# Altium PCB pcbphongbep.PcbDoc
Units mm, origin at the board's own origin, x right, y up, seen from the top; angles counter-clockwise.
Board outline 104.77 x 80.77 mm, 2 copper layers (Top Layer, Bottom Layer); 29 components, 24 nets, 93 pads, 4 vias.
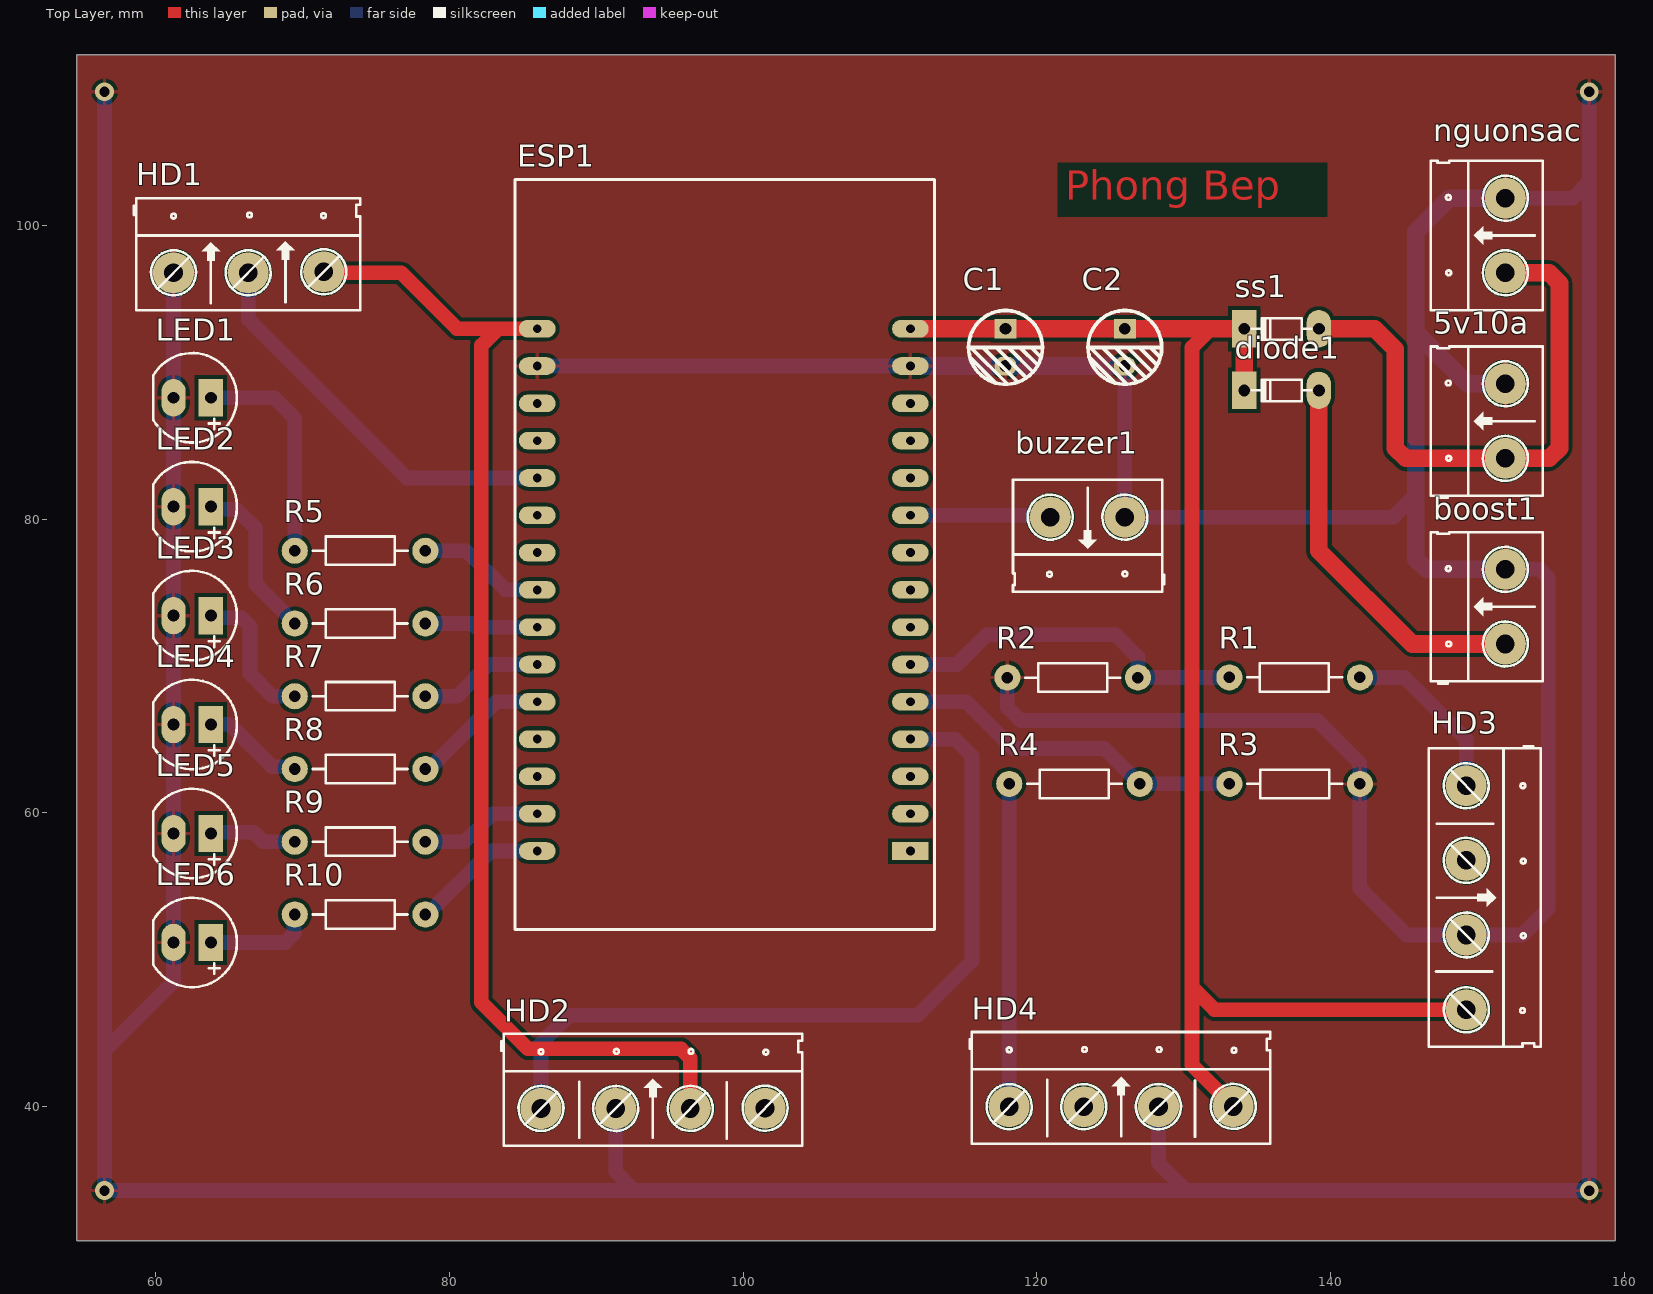
[diagram p0: Top Layer view]
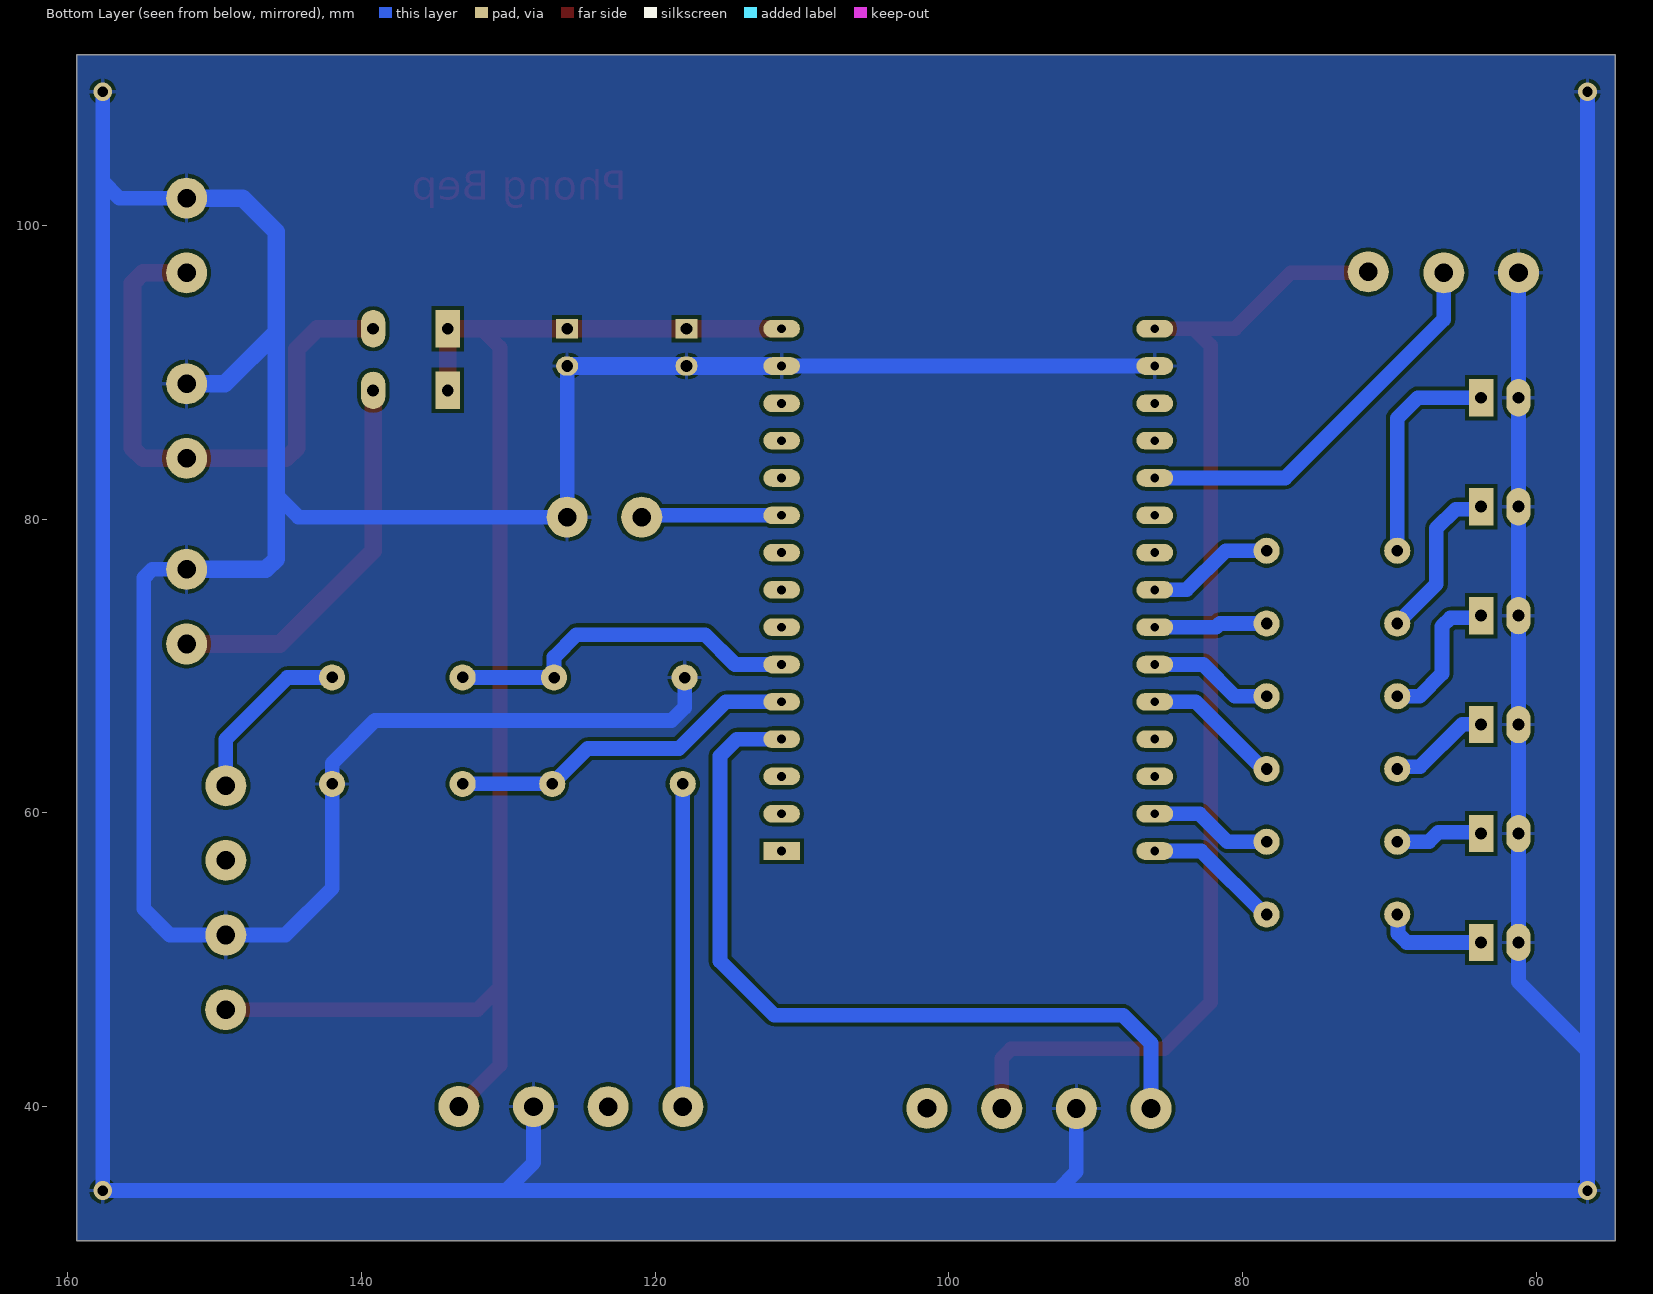
[diagram p1: Bottom Layer view, seen from below]
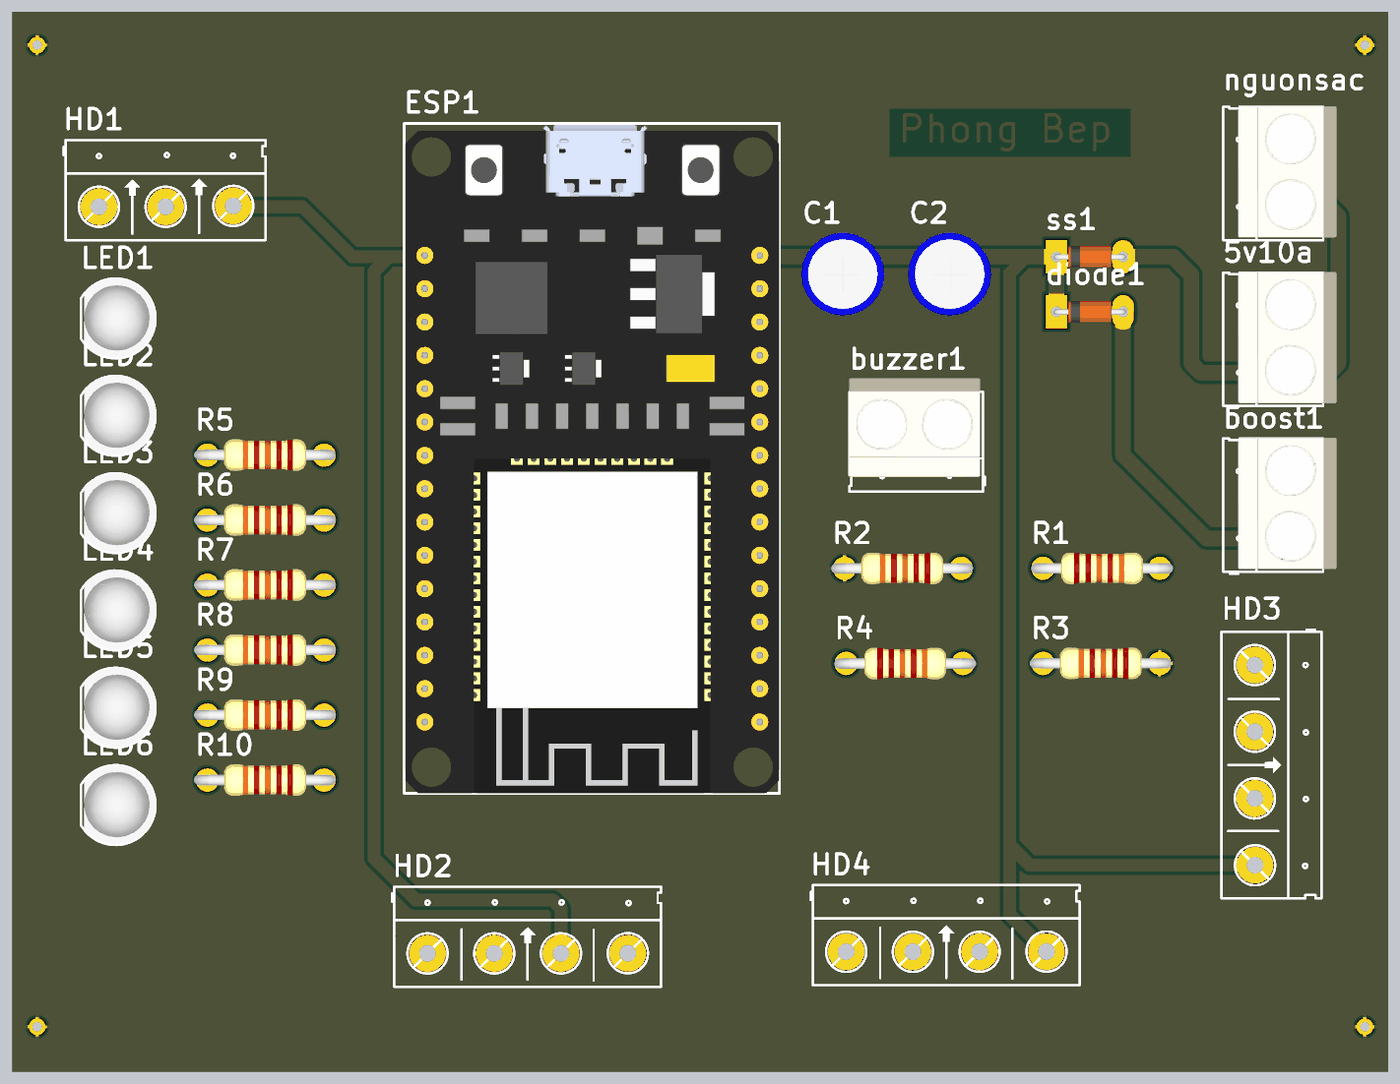
[diagram p2: 3D render of the assembled board from above, using the file's embedded part models]

## Layer stack, top to bottom
Top Solder: solder mask 0.0102, Solder Resist, Dk 3.5
Top Layer: signal copper 0.0356
Dielectric 1: dielectric 0.32, FR-4, Dk 4.8
Bottom Layer: signal copper 0.0356
Bottom Solder: solder mask 0.0102, Solder Resist, Dk 3.5

## Board outline
54.61,30.861 159.385,30.861 159.385,111.633 54.61,111.633

## Design rules (kind name [scope] priority, off if disabled: settings)
Clearance [All] p1: gap=0.254 ignorepadtopadclearanceinfootprint=FALSE except(0: Arc-Hole Track-Hole SMDPad-Hole THPad-Hole Via-Hole Fill-Hole Poly-Hole Region-Hole Text-Hole)
PolygonConnect [All] p1: connectstyle=Relief reliefconductorwidth=0.254 reliefentries=4 polygonreliefangle="90 Angle" airgapwidth=0.254
RoutingCorners [All] p1: cornerstyle=45-Degree minsetback=1 maxsetback=1
RoutingVias [All] p1: holewidth=0.711 width=1.27 viastyle="Through Hole" minholewidth=0.711 minwidth=1.27 maxholewidth=0.711 maxwidth=1.27
SolderMaskExpansion [All] p1: expansion=0.102 istentingtop=FALSE
Width [All] p1: maxlimit=1.2 minlimit=0.8 preferedwidth=1
29 further rules are at their usual default settings.

## Components (designator, comment, footprint, x,y, rotation, side; value= is the part's Value field where it differs from the comment)
5v10a "Header 2_1" HED2 151.892,84.138 r90 top value="Header 2"
boost1 "Header 2_1" HED2 151.892,71.501 r90 top value="Header 2"
buzzer1 "Header 2_1" HED2 125.984,80.137 r180 top value="Header 2"
C1 "0.1uF" "tu hoa 5mm" 117.856,91.694 r270 top
C2 "47uF" "tu hoa 5mm" 125.984,91.694 r270 top
diode1 "100v" "DIODE 0.5A" 136.652,88.773 r0 top
ESP1 "ESP32 DEVKIT" "ESP32 WROOM 32 KIT" 111.379,57.404 r180 top
HD1 "DHT BEP" HED3 61.214,96.774 r0 top value="Header 3"
HD2 "FLAMESENSOR" HED4 86.233,39.878 r0 top value="Header 4"
HD3 "KHOI" HED4 149.223,61.851 r270 top value="Header 4"
HD4 "GASS" HED4 118.108,40.003 r0 top value="Header 4"
LED1 "LED" LED-5-Green 63.754,88.265 r180 top value="LED 3 ly Single Colour"
LED2 "LED" LED-5-Green 63.754,80.848 r180 top value="LED 3 ly Single Colour"
LED3 "LED" LED-5-Green 63.754,73.431 r180 top value="LED 3 ly Single Colour"
LED4 "LED" LED-5-Green 63.754,66.015 r180 top value="LED 3 ly Single Colour"
LED5 "LED" LED-5-Green 63.754,58.598 r180 top value="LED 3 ly Single Colour"
LED6 "LED" LED-5-Green 63.754,51.181 r180 top value="LED 3 ly Single Colour"
nguonsac "Header 2_1" HED2 151.892,96.774 r90 top value="Header 2"
R1 "10k" R1/4W 141.986,69.227 r180 top value="R1/4W - 1K"
R2 "20k" R1/4W 117.983,69.215 r0 top value="R1/4W - 1K"
R3 "20k" R1/4W 133.096,61.976 r0 top value="R1/4W - 1K"
R4 "10k" R1/4W 127,61.976 r180 top value="R1/4W - 1K"
R5 "330" R1/4W 69.469,77.851 r0 top value="R1/4W - 1K"
R6 "330" R1/4W 69.469,72.898 r0 top value="R1/4W - 1K"
R7 "330" R1/4W 69.469,67.945 r0 top value="R1/4W - 1K"
R8 "330" R1/4W 69.469,62.992 r0 top value="R1/4W - 1K"
R9 "330" R1/4W 69.469,58.039 r0 top value="R1/4W - 1K"
R10 "330" R1/4W 69.469,53.086 r0 top value="R1/4W - 1K"
ss1 "100v" "DIODE 0.5A" 136.652,92.964 r0 top

## Footprints (in the part's own frame and the unit in brackets; to place one, negate y for a bottom-side part, rotate by r counter-clockwise, add the part's x,y. Pads: shape width x height; smd on the part's side, far side on the other; paste and mask are expansions set on the pad)
"DIODE 0.5A" [mil] "Diode muoi, xung"
  oval 65x100 hole 32: 1(100,0)
  rect 65x100 hole 32: 2(-100,0)
  silkscreen extent -80,-30 80,28, body extent -108,-33 108,32, height 61
"ESP32 WROOM 32 KIT" [mm]
  rect 2.5x1.2 hole 0.6: 1(0,0)
  oval 2.5x1.2 hole 0.6: 2(0,-2.54) 3(0,-5.08) 4(0,-7.62) 5(0,-10.16) 6(0,-12.7) 7(0,-15.24) 8(0,-17.78) 9(0,-20.32) 10(0,-22.86) 11(0,-25.4) 12(0,-27.94) 13(0,-30.48) 14(0,-33.02) 15(0,-35.56) 16(25.4,-35.56) 17(25.4,-33.02) 18(25.4,-30.48) 19(25.4,-27.94) 20(25.4,-25.4) 21(25.4,-22.86) 22(25.4,-20.32) 23(25.4,-17.78) 24(25.4,-15.24) 25(25.4,-12.7) 26(25.4,-10.16) 27(25.4,-7.62) 28(25.4,-5.08) 29(25.4,-2.54) 30(25.4,0)
  silkscreen extent -1.65,-45.72 26.92,5.33, body extent -1.65,-45.6 26.85,5.33, height 10.49
HED2 [mil] "Header 2, 2 pin, hight 300mil, Pin to Pin 200, Colour Green"
  round 110 hole 50: 1(0,0) 2(200,0)
  silkscreen extent -106,-100 300,200, body extent -92,-140 302,155, height 394
HED3 [mil] "Header 3, 3 pin, hight 300mil, Pin to Pin 200, Colour Green"
  round 110 hole 50: 1(0,0) 2(200,0) 3(402.62,2.62)
  silkscreen extent -106,-100 500,200
HED4 [mil] "Header 4, 4 pin, hight 300mil, Pin to Pin 200, Colour Green"
  round 110 hole 50: 1(0,0) 2(200,0) 3(400.06,0.06) 4(600.39,0.39)
  silkscreen extent -106,-100 700,200
LED-5-Green [mil] "LED 2 PIN, 5 ly , Only colour,pin to pin 100mil"
  rect 65x100 hole 32: 1(0,0)
  oval 65x100 hole 32: 2(100,0)
  silkscreen extent -70,-120 154,120, body extent -69,-120 145,117, height 339
R1/4W [mil] "R 1/4W, 2 Pin, 350mil"
  round 70 hole 31: 1(0,0) 2(350,0)
  silkscreen extent 48,-38 302,38, body extent -40,-47 386,47, height 111
"tu hoa 5mm" [mm]
  rect 1.3x1.5 hole 0.8: 1(-1.27,0)
  oval 1.3x1.5 hole 0.8: 2(1.27,0)
  silkscreen extent -2.51,-2.51 2.51,2.51, body extent -3.12,-3.18 3.23,3.18, height 14.55

## Part data
5v10a boost1 buzzer1 nguonsac: "Header, 2-Pin", Manufacturer="Generic Components", Class=Connector
C1: library part "Tu Hoa 0.1uF 50V 5x11", "Cắm", Chung_Loai=Cắm, Don_Vi=Con, Ma_Hang=MH006853, So_Chan=2, Ten_Linh_Kien="Tụ Hóa 0.1uF 50V"
C2: library part "Tu Hoa 47uF 16V 5x10", "Cắm", Chung_Loai=Cắm, Don_Vi=Con, Ma_Hang=MH006859, So_Chan=2, Ten_Linh_Kien="Tụ Hóa 47uF 16V"
diode1 ss1: library part "Diode 1N4148", "Cắm", Chung_Loai=Cắm, Don_Vi=Con, Ma_Hang=MH001065, Ten_Linh_Kien="Diode 1N4148 DO35 450mA 100V ( 1N4148 DIP)"
ESP1: library part "ESP32 WROOM 32 KIT"
HD1: library part Hed3, "Header 3 (Green)"
HD2 HD3 HD4: library part Hed4, "Header 4 (Green)"
LED1 LED2 LED3 LED4 LED5 LED6: "LED Single colour Green and Red"
R1 R2 R3 R4 R5 R6 R7 R8 R9 R10: library part R1/4W, "Resistor 1/4W"

## Via types
v1: diameter 1.27, hole 0.711, Top Layer to Bottom Layer, 4 vias

## Nets (pads, with @x,y where several pads share a name; then routed paths per layer and width w, separated by ;. In a path a pad name is that pad's centre, name@x,y a point inside that pad or via, vN(x,y) a via of type N, cw(c..) or ccw(c..) an arc to the next point about the centre after c; other vN are vias at no path point)
3v3: ESP1.16 HD1.3 HD2.3 | length 81.7
  Top Layer w1: HD1.3 71.507,96.774 76.708,96.774 80.518,92.964 83.312,92.964 ; ESP1.16 83.312,92.964 ; HD2.3 96.395,43.305 95.758,43.942 85.344,43.942 82.169,47.117 82.169,91.821 83.312,92.964
5v: C1.1 C2.1 diode1.2 ESP1.15 HD3.4 HD4.4 ss1.2 | length 101.2
  Top Layer w1: 131.826,92.964 130.556,91.694 130.556,48.133 ; HD4.4 130.556,42.816 130.556,48.133 ; HD3.4 132.088,46.601 130.556,48.133
  Top Layer w1.2: ESP1.15 C1.1 C2.1 131.826,92.964 ss1.2 diode1.2 ; HD4.4 HD4.4@133.622,39.749
a0: HD4.1 R4.2 | length 22.2
  Bottom Layer w1: R4.2 118.11,54.483 118.108,54.481 HD4.1 HD4.1@118.235,40.13
"a0 flame": ESP1.4 HD2.1 | length 54.7
  Bottom Layer w1: HD2.1 86.233,44.323 88.138,46.228 111.887,46.228 115.57,49.911 115.57,63.881 114.427,65.024 ESP1.4
"a0 khoi": ESP1.6 R1.2 R2.2 | length 24.6
  Bottom Layer w1: ESP1.6 114.554,70.104 116.586,72.136 125.349,72.136 126.873,70.612 R2.2 133.084,69.215 R1.2
chung: 5v10a.1 nguonsac.1 ss1.1 | length 39.5
  Top Layer w1.2: ss1.1 143.002,92.964 144.399,91.567 144.399,84.84 145.102,84.138 5v10a.1 154.872,84.138 155.575,84.84 155.575,96.071 154.872,96.774 nguonsac.1
data: ESP1.20 HD1.2 | length 27.3
  Bottom Layer w1: HD1.2 66.294,93.599 77.089,82.804 ESP1.20
GND: 5v10a.2 boost1.2 buzzer1.1 C1.2 C2.2 ESP1.14 ESP1.17 HD1.1 HD2.2 HD3.3 HD4.3 LED1.2 LED2.2 LED3.2 LED4.2 LED5.2 LED6.2 nguonsac.2 R2.1 R3.2 | length 514.6
  Bottom Layer w1: v1(56.515,109.093) 56.515,43.815 ; HD1.1 LED1.2 LED2.2 LED3.2 LED4.2 LED5.2 LED6.2 61.214,48.514 56.515,43.815 ; ESP1.17 ESP1.14 ; HD2.2 91.313,35.56 92.583,34.29 ; R2.1 117.983,67.183 118.872,66.294 139.065,66.294 141.986,63.373 R3.2 141.986,54.864 145.161,51.689 HD3.3 153.035,51.689 154.813,53.467 154.813,75.995 154.227,76.581 boost1.2 ; C2.2 buzzer1.1 144.272,80.137 145.796,81.661 ; HD4.3 128.27,36.195 130.175,34.29 ; nguonsac.2 156.464,101.854 157.607,102.997 ; v1@157.607,108.585 157.607,102.997 ; 56.515,43.815 v1(56.515,34.29) 92.583,34.29 ; 92.583,34.29 130.175,34.29 ; 130.175,34.29 v1(157.607,34.29) 157.607,102.997
  Bottom Layer w1.2: ESP1.14 C1.2 C2.2 ; boost1.2 146.499,76.581 145.796,77.284 145.796,81.661 145.796,92.71 ; 5v10a.2 149.288,89.218 145.796,92.71 ; nguonsac.2 148.082,101.854 145.796,99.568 145.796,92.71
  other v1: 157.607,109.093
L1: ESP1.23 R5.2 | length 8.7
  Bottom Layer w1: R5.2 81.153,77.851 83.82,75.184 ESP1.23
L2: ESP1.24 R6.2 | length 7.7
  Bottom Layer w1: R6.2 81.534,72.898 81.788,72.644 ESP1.24
L3: ESP1.25 R7.2 | length 8.5
  Bottom Layer w1: R7.2 80.518,67.945 82.677,70.104 ESP1.25
L4: ESP1.26 R8.2 | length 9.5
  Bottom Layer w1: R8.2 78.57,62.992 78.959,63.381 79.002,63.381 83.185,67.564 ESP1.26
L5: ESP1.29 R9.2 | length 8.4
  Bottom Layer w1: R9.2 81.026,58.039 82.931,59.944 ESP1.29
L6: ESP1.30 R10.2 | length 9.4
  Bottom Layer w1: R10.2 78.486,53.086 82.804,57.404 ESP1.30
Netboost1_1: boost1.1 diode1.1 | length 26.3
  Top Layer w1.2: diode1.1 139.192,77.851 145.542,71.501 boost1.1
Netbuzzer1_2: buzzer1.2 ESP1.10 | length 9.8
  Bottom Layer w1: ESP1.10 120.777,80.264 buzzer1.2 buzzer1.2@120.777,80.01
NetESP1_5: ESP1.5 R3.1 R4.1 | length 24
  Bottom Layer w1: ESP1.5 115.189,67.564 118.364,64.389 124.587,64.389 R4.1 R3.1
NetHD3_1: HD3.1 R1.1 | length 12.2
  Bottom Layer w1: R1.1 141.998,69.215 145.034,69.215 149.223,65.026 HD3.1
NetLED1_1: LED1.1 R5.1 | length 15.3
  Bottom Layer w1: LED1.1 68.072,88.265 69.469,86.868 R5.1
NetLED2_1: LED2.1 R6.1 | length 11.2
  Bottom Layer w1: LED2.1 63.919,80.683 65.494,80.683 66.802,79.375 66.802,75.565 R6.1
NetLED3_1: LED3.1 R7.1 | length 9.9
  Bottom Layer w1: LED3.1 63.927,73.431 64.079,73.279 65.835,73.279 66.421,72.693 66.421,69.469 67.945,67.945 R7.1
NetLED4_1: LED4.1 R8.1 | length 7.6
  Bottom Layer w1: LED4.1@64.079,65.57 63.754,65.896 LED4.1 63.779,66.04 65.024,66.04 67.923,63.141 69.32,63.141 R8.1
NetLED5_1: LED5.1 R9.1 | length 6
  Bottom Layer w1: LED5.1 63.83,58.674 66.675,58.674 67.31,58.039 R9.1
NetLED6_1: LED6.1 R10.1 | length 7.2
  Bottom Layer w1: LED6.1 68.824,51.181 69.41,51.767 69.41,53.027 R10.1
pads on no net: ESP1.1 ESP1.2 ESP1.3 ESP1.7 ESP1.8 ESP1.9 ESP1.11 ESP1.12 ESP1.13 ESP1.18 ESP1.19 ESP1.21 ESP1.22 ESP1.27 ESP1.28 HD2.4 HD3.2 HD4.2

## Polygon pours and split planes (outlines as drawn)
GND on Bottom Layer "GND_L02_P000" (solid, pour order 0): 54.61,111.633 159.385,111.633 159.385,30.861 54.61,30.861
GND on Top Layer "GND_L01_P001" (solid, pour order 1): 54.61,111.633 159.385,111.633 159.385,30.861 54.61,30.861

## Other copper
Top Layer:
  text "Phong Bep" at 121.92,101.758 h2